# Altium PCB PCB1.PcbDoc
Units mm, origin at the board's own origin, x right, y up, seen from the top; angles counter-clockwise.
Board outline 47.62 x 41.27 mm, 2 copper layers (Top Layer, Bottom Layer); 11 components, 8 nets, 31 pads, 0 vias.
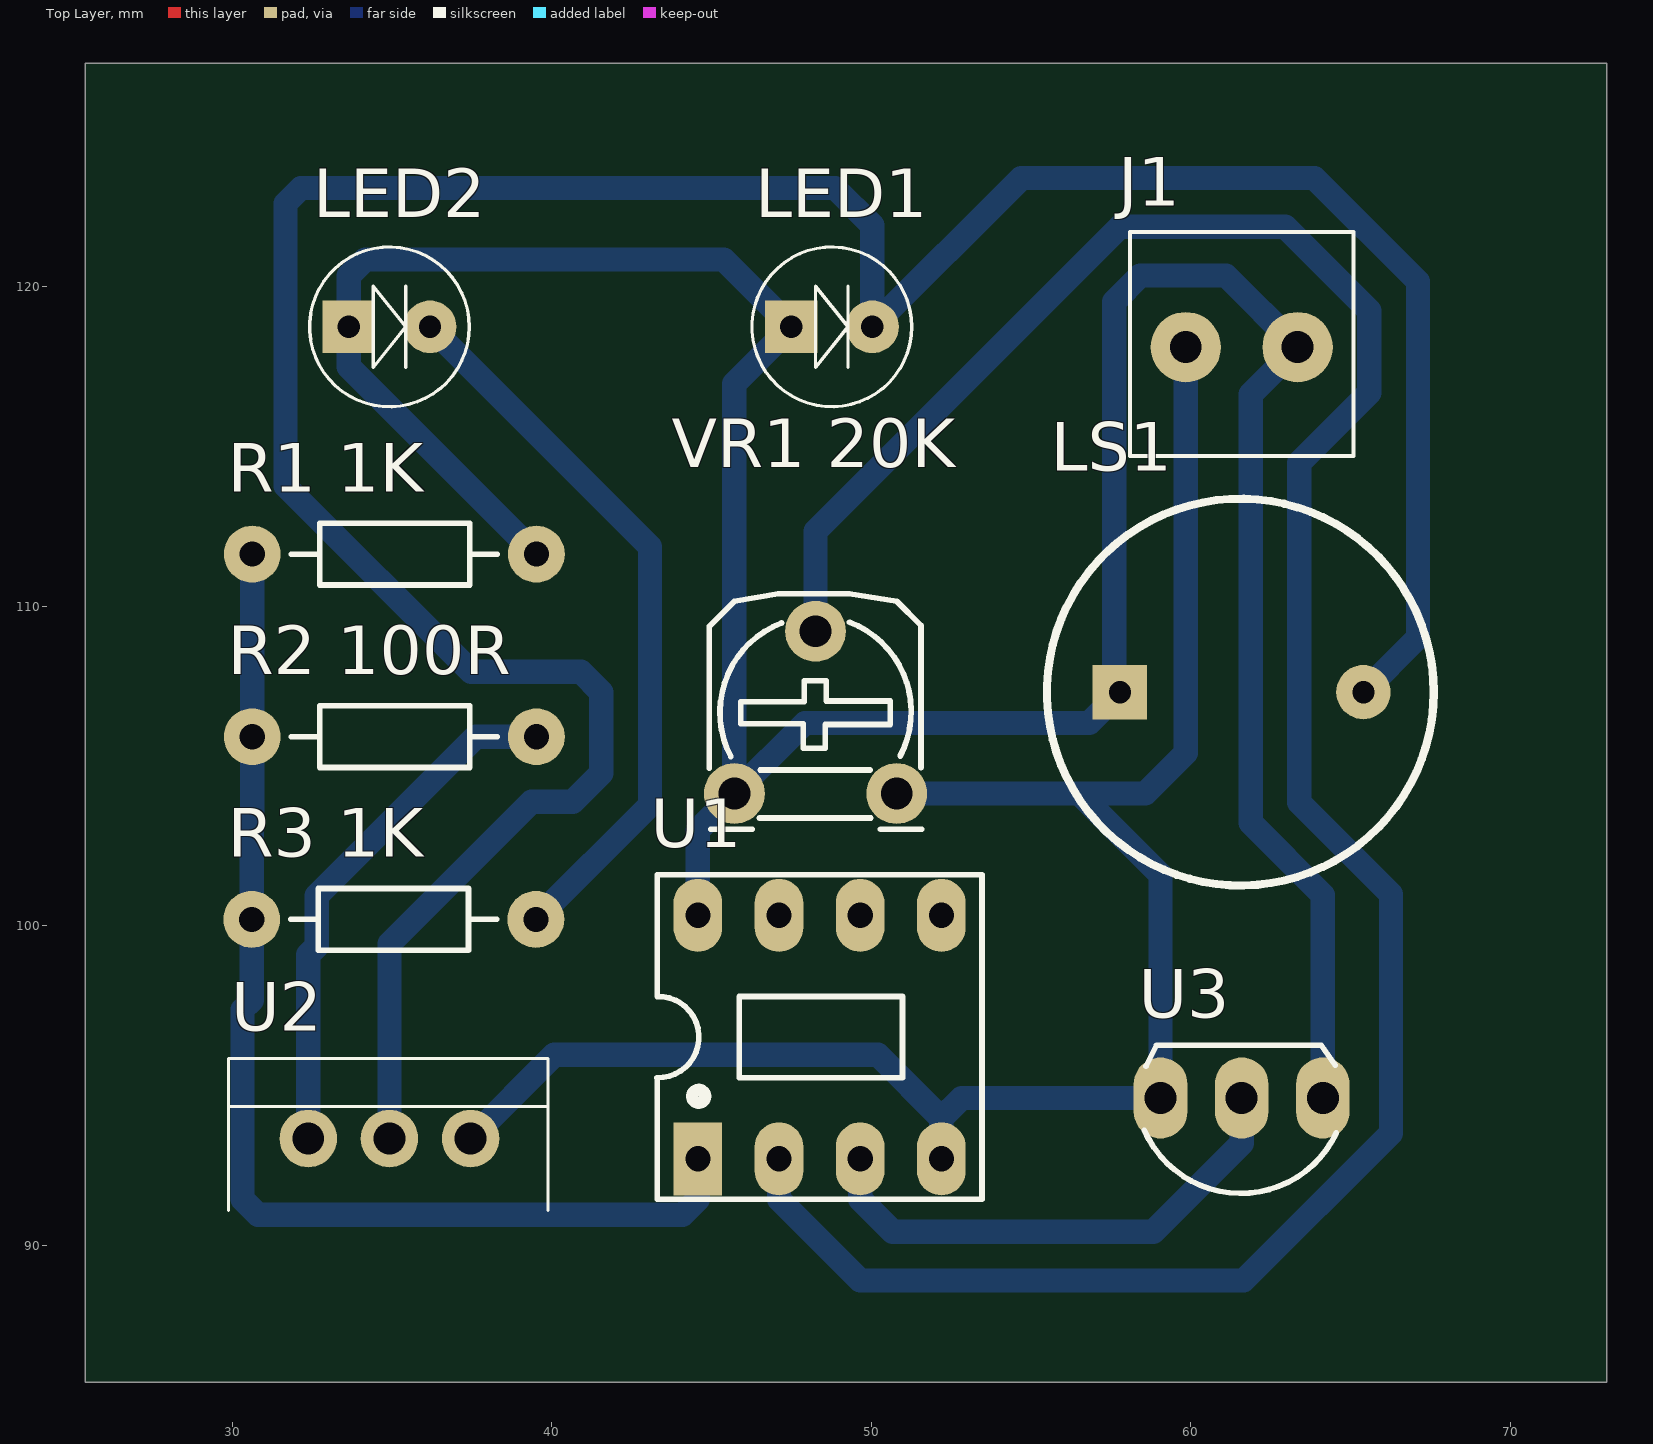
[diagram p0: Top Layer view]
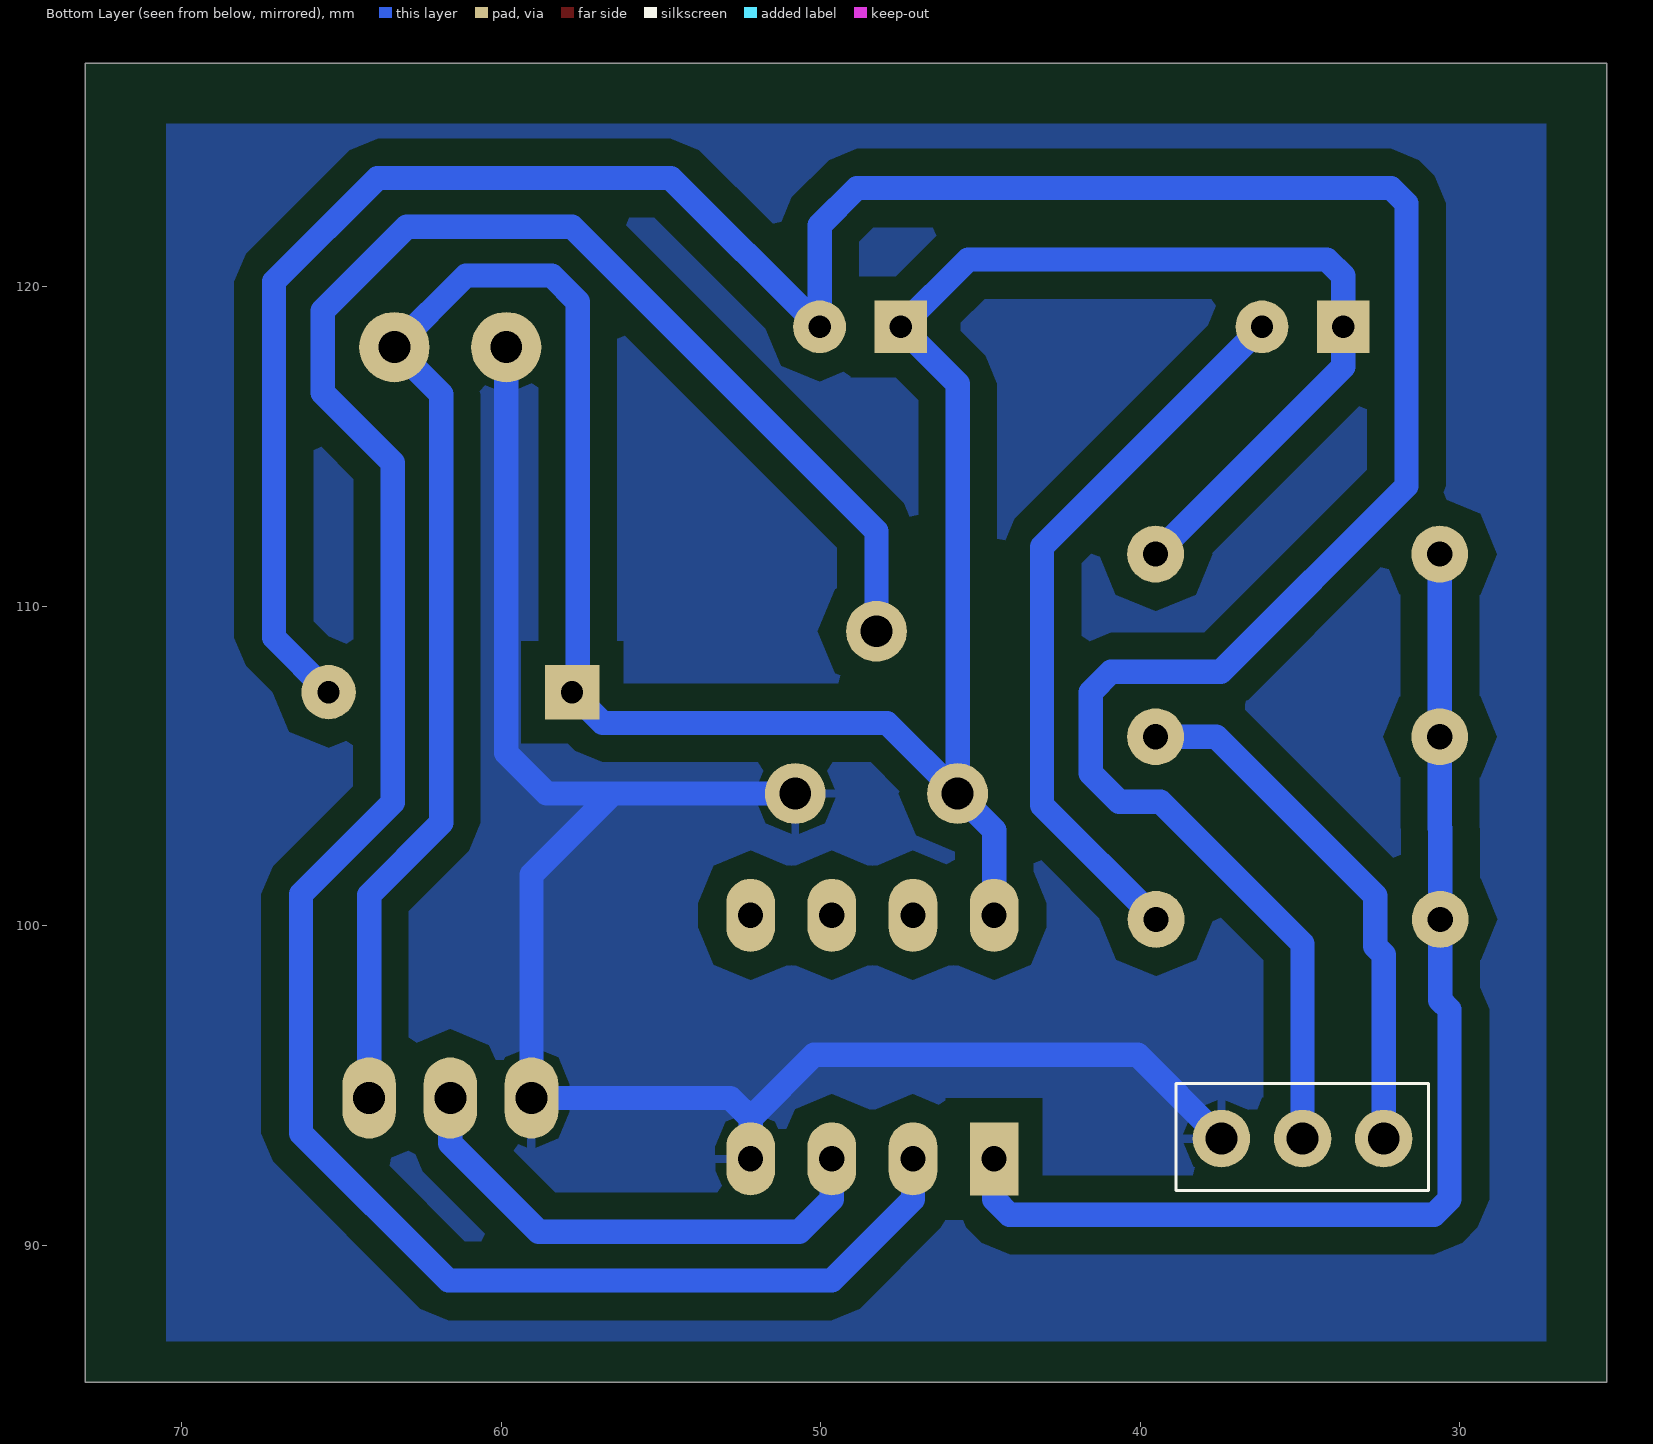
[diagram p1: Bottom Layer view, seen from below]
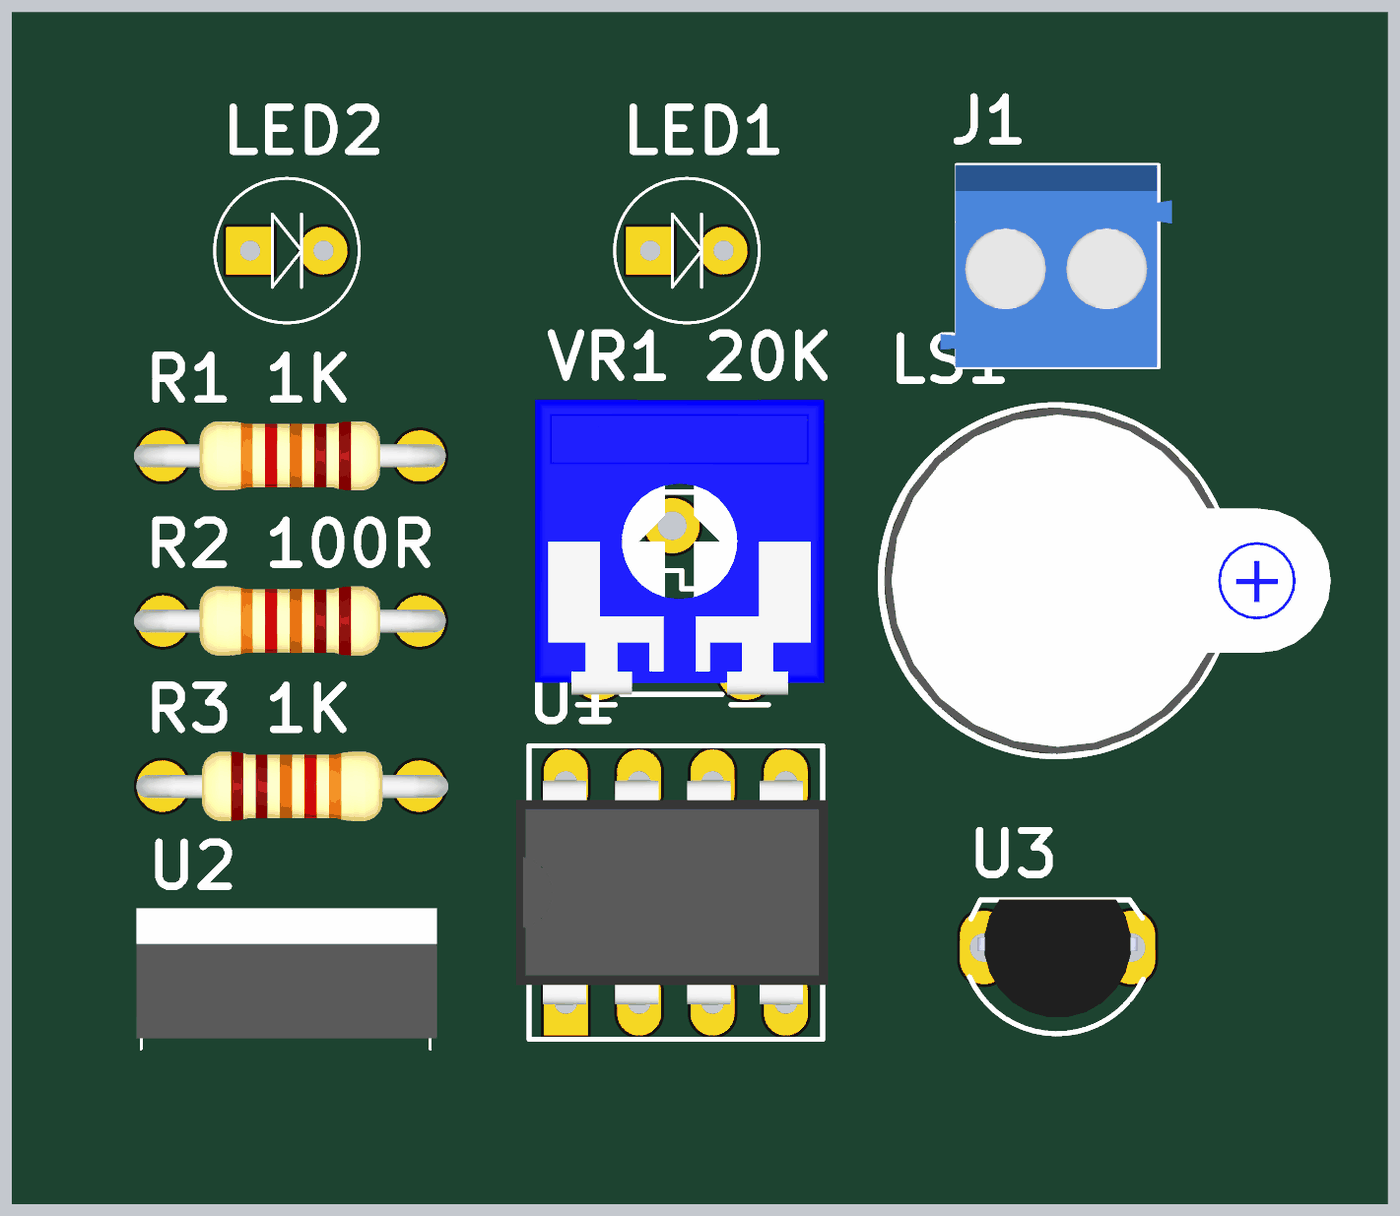
[diagram p2: 3D render of the assembled board from above, using the file's embedded part models]

## Layer stack, top to bottom
Top Solder: solder mask 0.0102, Solder Resist, Dk 3.5
Top Layer: signal copper 0.0356
Dielectric 1: dielectric 0.32, FR-4, Dk 4.8
Bottom Layer: signal copper 0.0356
Bottom Solder: solder mask 0.0102, Solder Resist, Dk 3.5

## Board outline
25.4,85.725 25.4,127 73.025,127 73.025,85.725

## Design rules (kind name [scope] priority, off if disabled: settings)
Clearance [All] p1: gap=0.762
PolygonConnect [All] p1: connectstyle=Relief reliefconductorwidth=0.254 reliefentries=4 polygonreliefangle="90 Angle" airgapwidth=0.254
RoutingLayers [All] p1: top layer_v5=FALSE bottom layer_v5=TRUE
RoutingVias [All] p1: holewidth=0.711 width=2.032 viastyle="Through Hole" minholewidth=0.711 minwidth=2.032 maxholewidth=0.711 maxwidth=2.032
SolderMaskExpansion [All] p1: expansion=0.102
Width [All] p1: maxlimit=1.016 minlimit=0.508 preferedwidth=0.762
29 further rules are at their usual default settings.

## Components (designator, comment, footprint, x,y, rotation, side; value= is the part's Value field where it differs from the comment)
J1 "KF2" KF2-3.5 61.595,118.11 r180 top
LED1 "LED" LED-5MM-RED 47.498,118.745 r0 top
LED2 "LED" LED-5MM-GREEN 33.655,118.745 r0 top
LS1 "Buzzer" Buzzer 57.785,107.315 r0 top
"R1 1K" "1K" R1/4W 30.632,111.633 r0 top (schematic designator R1)
"R2 100R" "100R" R1/4W 30.632,105.918 r0 top (schematic designator R2)
"R3 1K" "1K" R1/4W 39.507,100.203 r180 top (schematic designator R3)
U1 "LM393" DIP8 48.26,96.52 r0 top
U2 "IRF540_1" TO-220N 32.385,93.345 r270 top
U3 "LM35" TO92-123 61.595,94.615 r180 top
"VR1 20K" "20K" VR-S2 45.72,104.14 r0 top (schematic designator VR1)

## Footprints (in the part's own frame and the unit in brackets; to place one, negate y for a bottom-side part, rotate by r counter-clockwise, add the part's x,y. Pads: shape width x height; smd on the part's side, far side on the other; paste and mask are expansions set on the pad)
Buzzer [mil] "Buzzer; Solder Pad 35mil"
  rect 67x67 hole 27.56: 1(0,0)
  round 67 hole 27.56: 2(300,0)
  silkscreen extent -90,-238 387,238, body extent -86,-236 522,236, height 177
DIP8 [mil] "DIP, 8-Leads, Row Spacing 7.62mm, Pitch 2.54mm, Body 9.91x6.73mm"
  rect 60x90 hole 31: 1(-145,-150)
  oval 60x90 hole 31: 2(-45,-150) 3(55,-150) 4(155,-150) 5(155,150) 6(55,150) 7(-45,150) 8(-145,150)
  silkscreen extent -195,-200 205,200, body extent -213,-153 213,153, height 177
KF2-3.5 [mm] "3,50mm - modular - blue - Horizontal wire entry - Pressure clamp - 8,4mm height - 02p"
  round 2.2 hole 1: 1(-1.75,0) 2(1.75,0)
  silkscreen extent -3.5,-3.6 3.5,3.4, body extent -3.95,-3.6 4.05,3.4, height 8.41
LED-5MM-GREEN [mil]
  rect 65x65 hole 27.56: 1(0,0)
  round 65 hole 27.56: 2(100,0)
  silkscreen extent -48,-98 148,98, body extent -54,-105 155,105, height 370
LED-5MM-RED [mil]
  rect 65x65 hole 27.56: 1(0,0)
  round 65 hole 27.56: 2(100,0)
  silkscreen extent -48,-98 148,98, body extent -54,-105 155,105, height 370
R1/4W [mil] "R 1/4W, 2 Pin, 350mil"
  round 70 hole 31: 1(0,0) 2(350,0)
  silkscreen extent 48,-38 302,38, body extent -40,-47 386,47, height 111
TO92-123 [mm] "TO-92"
  oval 1.676x2.54 hole 1: 1(-2.54,0) 2(0,0) 3(2.54,0)
  silkscreen extent -2.96,-1.65 3.05,2.99, body extent -2.77,-1.67 2.77,2.41, height 6.22
TO-220N [mm]
  round 1.8 hole 1: 1(0,0) 2(0,2.54) 3(0,5.08)
  silkscreen extent -2.5,-2.5 2.25,7.5, body extent -2.62,-2.67 1.88,7.73, height 18
VR-S2 [mm] "Resistor Variable"
  round 1.905 hole 1: 1(0,0) 2(2.54,5.08) 3(5.08,0)
  silkscreen extent -0.79,-1.12 5.87,6.25, body extent -2.21,-0.76 7.79,9.44, height 4.2

## Part data
LED1 LED2: "LED Single colour Green and Red"
LS1: "Magnetic Transducer Buzzer"
"R1 1K" "R2 100R" "R3 1K": library part R1/4W, "Resistor 1/4W"
U1: "IC DUAL COMPARATOR"
U2: "IRF9540 - N-CHANNEL POWER MOSFETS"
U3: "Teminal"
"VR1 20K": library part VR-S, "Var Resistor"

## Nets (pads, with @x,y where several pads share a name; then routed paths per layer and width w, separated by ;. In a path a pad name is that pad's centre, name@x,y a point inside that pad or via, vN(x,y) a via of type N, cw(c..) or ccw(c..) an arc to the next point about the centre after c; other vN are vias at no path point)
GND: "VR1 20K.3" J1.2 U1.4 U2.3 U3.3 | length 57.9
  Bottom Layer w0.762: U2.3 40.081,95.961 50.216,95.961 52.197,93.98 ; 50.8,104.14 56.515,104.14 ; U1.4 52.197,93.98 ; J1.2 59.845,105.41 58.575,104.14 56.515,104.14 ; 52.197,93.98 52.832,94.615 U3.3 59.055,101.6 56.515,104.14
NetLED1_2: LED1.2 LS1.2 U2.2 | length 95
  Bottom Layer w0.762: U2.2 34.925,99.441 39.37,103.886 40.665,103.886 41.554,104.775 41.554,107.315 40.919,107.95 37.49,107.95 31.674,113.767 31.674,122.606 32.156,123.088 48.87,123.088 50.038,121.92 LED1.2 54.694,123.401 63.873,123.401 67.112,120.162 67.112,109.022 LS1.2
NetLED2_2: "R3 1K.1" LED2.2 | length 22.9
  Bottom Layer w0.762: LED2.2 43.078,111.862 43.078,103.774 39.507,100.203
NetR1_1: "R1 1K.1" "R2 100R.1" "R3 1K.2" U1.1 | length 36.2
  Bottom Layer w0.762: 30.632,111.633 30.632,105.918 30.632,103.063 30.617,103.048 30.617,100.203 30.617,97.673 30.328,97.384 30.328,91.44 30.81,90.957 44.094,90.957 44.577,91.44 U1.1
NetR2_2: "R2 100R.2" U2.1 | length 16.6
  Bottom Layer w0.762: U2.1 32.385,99.097 32.649,99.361 32.649,100.937 37.63,105.918 39.522,105.918
NetU1_2: "VR1 20K.2" U1.2 | length 76.7
  Bottom Layer w0.762: U1.2 47.117,91.44 49.657,88.9 61.654,88.9 66.269,93.515 66.269,100.99 63.398,103.861 63.398,114.495 65.588,116.685 65.588,119.248 62.959,121.877 57.785,121.877 48.26,112.352 48.26,109.22
NetU1_3: U1.3 U3.2 | length 16.2
  Bottom Layer w0.762: U1.3 49.657,91.44 50.673,90.424 58.826,90.424 61.595,93.193 U3.2
VCC: "R1 1K.2" "VR1 20K.1" J1.1 LED1.1 LED2.1 LS1.1 U1.8 U3.1 | length 103.6
  Bottom Layer w0.762: 39.522,111.633 33.655,117.5 LED2.1 33.655,120.345 34.163,120.853 45.39,120.853 LED1.1 45.72,116.967 45.72,104.14 ; U1.8 44.577,102.997 45.72,104.14 ; LS1.1 56.82,106.35 47.93,106.35 45.72,104.14 ; LS1.1@57.988,107.239 57.602,107.625 57.602,119.535 58.42,120.353 61.102,120.353 J1.1 61.874,116.639 61.874,103.226 64.135,100.965 U3.1
pads on no net: U1.5 U1.6 U1.7

## Polygon pours and split planes (outlines as drawn)
GND on Bottom Layer "Mechanical 1-No Net" (solid, pour order 6): 27.305,125.095 70.485,125.095 70.485,86.995 27.305,86.995 27.305,125.095